# EAGLE board fanctrl (EAGLE 9.5.0)
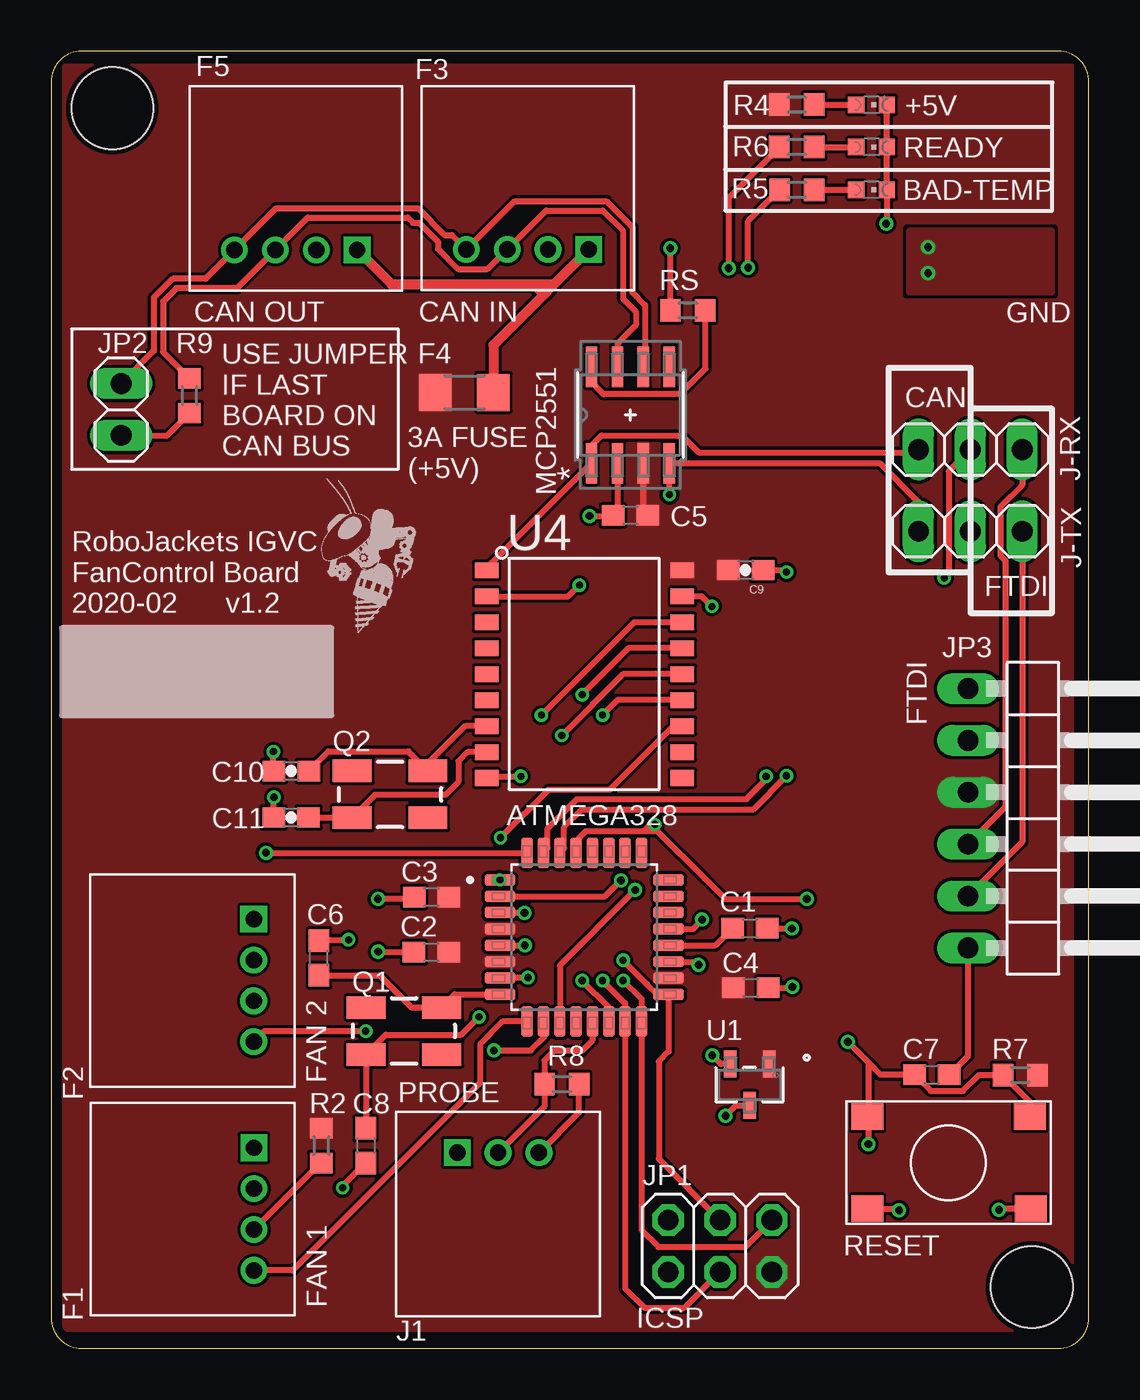
[diagram p0: board, top side]
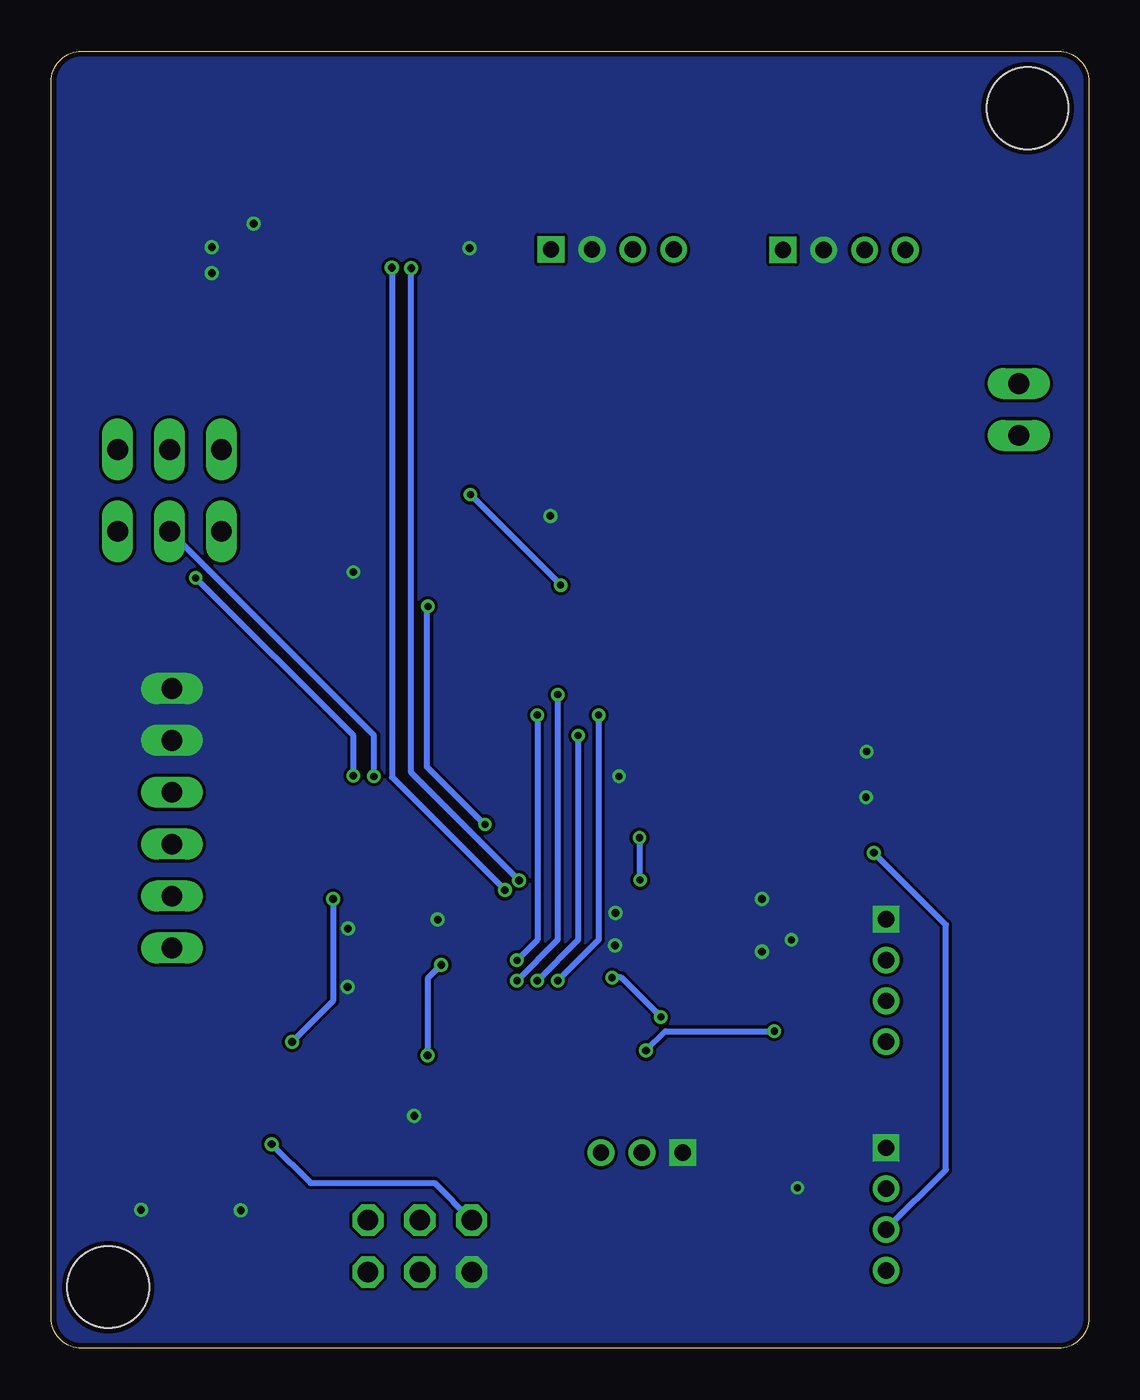
[diagram p1: board, bottom side, seen from below]

Size 50.8 x 63.5 mm. Coordinates in mm from the lower left corner, seen from the top.
Outline: 0,62 0,1.5 arc90 1.5,0 49.3,0 arc90 50.8,1.5 50.8,62 arc90 49.3,63.5 1.5,63.5 arc90 0,62
Copper layers (1*16): Top 0.035mm / dielectric 1.5mm / Bottom 0.035mm
Design rules "ITEADstudio_DRC": minimum track width 6mil, minimum drill 12mil, track to track 6mil, track to pad 6mil, pad to pad 6mil, via to via 6mil, smd to smd 0mil, copper to edge 10mil, drill to drill 10mil, minimum pad ring 10mil, minimum via ring 6mil, stop-mask expansion 2mil, vias tented up to drill 100mil, thermal gap 10mil
Holes 4 mm at 3,60.7 48,3

## Footprints (pad centres in the part's own frame; a part is rotated, then mirrored left to right if it is on the bottom)
CHIPLED_0603 = smd 0.8 x 0.8: A 0,-0.75; C 0,0.75
TQFP-32 = smd 1.5 x 0.57: 1 -4.13,2.8; 2 -4.13,2; 3 -4.13,1.2; 4 -4.13,0.4; 5 -4.13,-0.4; 6 -4.13,-1.2; 7 -4.13,-2; 8 -4.13,-2.8; 17 4.13,-2.8; 18 4.13,-2; 19 4.13,-1.2; 20 4.13,-0.4; 21 4.13,0.4; 22 4.13,1.2; 23 4.13,2; 24 4.13,2.8 | smd 0.57 x 1.5: 9 -2.8,-4.13; 10 -2,-4.13; 11 -1.2,-4.13; 12 -0.4,-4.13; 13 0.4,-4.13; 14 1.2,-4.13; 15 2,-4.13; 16 2.8,-4.13; 25 2.8,4.13; 26 2,4.13; 27 1.2,4.13; 28 0.4,4.13; 29 -0.4,4.13; 30 -1.2,4.13; 31 -2,4.13; 32 -2.8,4.13
PTS645 = smd 1.55 x 1.3: P$1 -3.975,2.25; P$2 3.975,2.25; P$3 -3.975,-2.25; P$4 4.025,-2.25
C0603 = smd 1.1 x 1: 1 -0.85,0; 2 0.85,0
0603-CAP = smd 1.1 x 1: 1 -0.85,0; 2 0.85,0
2MM-4-H = drill 0.8 square: 1 -3,0 | drill 0.8: 2 -1,0; 3 1,0; 4 3,0
F1206 = smd 1.6 x 1.803: 1 -1.422,0; 2 1.422,0
2MM-3-H = drill 0.8 square: 1 -2,0 | drill 0.8: 2 0,0; 3 2,0
1X03 = drill 1.016 long: 1 -2.54,0; 2 0,0; 3 2.54,0
2X03 = drill 1.016 octagon: 1 -2.54,-1.27; 2 -2.54,1.27; 3 0,-1.27; 4 0,1.27; 5 2.54,-1.27; 6 2.54,1.27
1X02 = drill 1.016 long: 1 -1.27,0; 2 1.27,0
1X06/90 = drill 1.016 long: 1 -6.35,-3.81; 2 -3.81,-3.81; 3 -1.27,-3.81; 4 1.27,-3.81; 5 3.81,-3.81; 6 6.35,-3.81
SOIC8-N_MC = smd 1.981 x 0.559: 1 -2.362,1.905; 2 -2.362,0.635; 3 -2.362,-0.635; 4 -2.362,-1.905; 5 2.362,-1.905; 6 2.362,-0.635; 7 2.362,0.635; 8 2.362,1.905
CRYSTAL-SMD-5X3 = smd 1.9 x 1.1: 1 -1.85,-1.15; 2 1.85,-1.15; 3 1.85,1.15; 4 -1.85,1.15
R0603 = smd 1 x 1.1: 1 -0.85,0; 2 0.85,0
SOT-23_MC = smd 0.619 x 1.31: 1 -0.95,-1.015; 2 0.95,-1.015; 3 0,1.015
SO-18W = smd 0.762 x 1.143: 1 -5.08,-4.788; 2 -3.81,-4.788; 3 -2.54,-4.788; 4 -1.27,-4.788; 5 0,-4.788; 6 1.27,-4.788; 7 2.54,-4.788; 8 3.81,-4.788; 9 5.08,-4.788; 10 5.08,4.788; 11 3.81,4.788; 12 2.54,4.788; 13 1.27,4.788; 14 0,4.788; 15 -1.27,4.788; 16 -2.54,4.788; 17 -3.81,4.788; 18 -5.08,4.788

## Placement (x,y rotation side)
+5V  GREEN  [CHIPLED_0603]  40.16,60.87 270 top
ATMEGA328  ATMEGA328P-AU  [TQFP-32]  26.1,20.13 0 top
B1  PTS645  [PTS645]  43.93,9.09 0 top
BAD-TEMP  RED  [CHIPLED_0603]  40.16,56.71 270 top
C1  0.1µF  [C0603]  34.2,20.56 0 top
C2  0.1µF  [C0603]  18.61,19.39 180 top
C3  0.1µF  [C0603]  18.62,22.09 180 top
C4  0.1µF  [C0603]  34.24,17.66 0 top
C5  0.1µF  [C0603]  28.36,40.77 180 top
C6  22pF  [C0603]  13.11,19.11 90 top
C7  0.1µF  [C0603]  43.11,13.4 0 top
C8  22pF  [C0603]  15.4,9.93 270 top
C9  0.1uF  [0603-CAP]  34,38.1 180 top
C10  22pF  [0603-CAP]  11.76,28.26 0 top
C11  22pF  [0603-CAP]  11.75,25.99 0 top
F1  4-PIN_2MM-H  [2MM-4-H]  9.93,6.82 270 top
F2  4-PIN_2MM-H  [2MM-4-H]  9.92,18.01 270 top
F3  4-PIN_2MM-H  [2MM-4-H]  23.32,53.79 180 top
F4  3A  [F1206]  20.23,46.79 180 top
F5  4-PIN_2MM-H  [2MM-4-H]  11.98,53.77 180 top
J1  3-PIN_2MM-H  [2MM-3-H]  21.88,9.58 0 top
J-RX  [1X03]  45,44 0 top
J-TX  [1X03]  45,40 0 top
JP1  ICSP  [2X03]  32.75,5.01 180 top
JP2  CAN_JUMPER  [1X02]  3.43,45.96 90 top
JP3  FTDI  [1X06/90]  48.7,25.95 270 top
MCP2551  MCP2551T-I/SN  [SOIC8-N_MC]  28.36,45.69 90 top
Q1  16MHz  [CRYSTAL-SMD-5X3]  17.27,15.54 0 top
Q2  16MHz  [CRYSTAL-SMD-5X3]  16.59,27.12 180 top
R2  1K  [R0603]  13.23,9.93 270 top
R4  470Ω  [R0603]  36.5,60.88 180 top
R5  470Ω  [R0603]  36.51,56.71 180 top
R6  470Ω  [R0603]  36.5,58.8 180 top
R7  10K  [R0603]  47.45,13.38 0 top
R8  4.7K  [R0603]  25,12.94 0 top
R9  120Ω  [R0603]  6.78,46.63 90 top
READY  BLUE  [CHIPLED_0603]  40.16,58.8 270 top
RS  60K  [R0603]  31.17,50.8 180 top
U1  MCP9701T-E/TT  [SOT-23_MC]  34.2,12.91 180 top
U4  MCP2515  [SO-18W]  26.11,33 270 top
U$1  [ROBOBUZZ_0.4X]  15,35 0 top

## Library data of the parts
+5V BAD-TEMP READY = led
ATMEGA328 = Microcontroller; CREATED_BY: PCBLayout.com; DIGIKEY_PART_NUMBER: ATMEGA328P-AU-ND; MANUFACTURER: Microchip Technology; MPN: ATMEGA328P-AU; PACKAGE: TQFP-32
B1 = RoboJackets-Switches; FUNCTION: RESET µCONTROLLER
C1-C8 = rcl; SPICEPREFIX: C
C9 = SparkFun-Capacitors; PROD_ID: CAP-00810
C10 C11 = SparkFun-Capacitors; PROD_ID: CAP-07876
F1-F3 F5 = RoboJackets-Connectors; DIGIKEY: WM18933-ND; MPN: 0353630460
F4 = RoboJackets-Fuses
J1 = RoboJackets-Connectors; PINS: 3; PIN_PITCH: 2.0 mm
J-RX J-TX JP1 JP3 = pinhead
JP2 = pinhead; SPICEPREFIX: B
MCP2551 = IGVC-Microcontroller; MANUFACTURER_PART_NUMBER: MCP2551TISN; VENDOR: Microchip
Q1 Q2 = SparkFun-FreqCtrl; PROD_ID: XTAL-08218
R2 R4-R6 R8 R9 RS = rcl; SPICEPREFIX: R
R7 = adafruit
U1 = MCP9701; MANUFACTURER_PART_NUMBER: MCP9701TETT; VENDOR: Microchip
U4 = SparkFun-DigitalIC; PROD_ID: IC-09906
U$1 = RoboJackets-Aesthetics

## Nets
!RESET: ATMEGA328.29 B1.P$1 B1.P$2 C7.1 JP1.5 R7.1 U4.17
+5V: ATMEGA328.4 ATMEGA328.6 ATMEGA328.18 C2.1 C3.1 C4.1 C5.1 C9.2 F4.2 JP1.2 JP3.3 MCP2551.3 R2.1 R4.2 R7.2 U1.1 U4.18
+5V_UNFUSED: F3.1 F4.1 F5.1
ANALOG-TEMP-READING: ATMEGA328.19 U1.2
AREF: ATMEGA328.20 C1.1
CAN_CS: ATMEGA328.14 U4.16
CAN_INT: ATMEGA328.1 U4.12
CAN_N: F3.4 F5.4 JP2.2 MCP2551.6
CAN_P: F3.3 F5.3 MCP2551.7 R9.2
CAN_RS: MCP2551.8 RS.1
CAN_RXD: J-TX.1 MCP2551.4 U4.2
CAN_TXD: J-RX.1 MCP2551.1 U4.1
DTR: C7.2 JP3.6
FAN1-PWM-OUT: ATMEGA328.9 F1.4
FAN1-TACH: ATMEGA328.32 F1.3 R2.2
FAN2-PWM-OUT: ATMEGA328.10 F2.4
FTDI_RX: J-TX.3 JP3.5
FTDI_TX: J-RX.3 JP3.4
GND: +5V.C ATMEGA328.3 ATMEGA328.5 ATMEGA328.21 B1.P$3 B1.P$4 BAD-TEMP.C C1.2 C2.2 C3.2 C4.2 C5.2 C6.2 C8.2 C9.1 C10.1 C11.1 F1.1 F2.1 F3.2 F5.2 J1.1 JP1.6 JP3.1 JP3.2 MCP2551.2 READY.C RS.2 U1.3 U4.9
INVALID-TEMP-LED: ATMEGA328.11 R5.2
MISO: ATMEGA328.16 JP1.1 U4.15
MOSI: ATMEGA328.15 JP1.4 U4.14
N$1: ATMEGA328.7 C8.1 Q1.1
N$2: J1.3 R8.2
N$3: +5V.A R4.1
N$4: BAD-TEMP.A R5.1
N$5: R6.1 READY.A
N$7: ATMEGA328.8 C6.1 Q1.3
N$17: C11.2 Q2.3 U4.8
N$18: C10.2 Q2.1 U4.7
PROBE-1WIRE: ATMEGA328.13 J1.2 R8.1
R_JUMPER: JP2.1 R9.1
RX: ATMEGA328.30 J-RX.2
SCK: ATMEGA328.17 JP1.3 U4.13
STATUS-READY-LED: ATMEGA328.2 R6.2
TX: ATMEGA328.31 J-TX.2

## Tracks (layer width: path | path; a pad name or v marks a point on that pad's centre or on a via)
!RESET  (via drill 0.35, 0.38)
  Top 0.3: v40,10 40,11.29 B1.P$1 40,11.38 40,14 | 29,25.31 29.69,25.31 32,23 33,22 v37,22 | 29,25.31 26.17,25.31 25.7,24.84 ATMEGA328.29 | 40,14 40.6,13.4 C7.1 43.06,12.6 44.63,12.6 45.43,13.38 R7.1 47.91,12.07 B1.P$2 | v39,15 40,14 | v32.35,36.32 31.86,36.81 U4.17 | 29,25.31 29.33,25.64 v29.55,25.64
  Bottom 0.3: v40,10 38.1,8.1 32.03,8.1 JP1.5 | v39,15 37,17 v37,22 | v29.55,25.64 29.59,25.64 32.4,28.46 32.4,36.27 v32.35,36.32
+5V
  Top 0.3: MCP2551.3 28.98,43.32 28.98,40.99 C5.1
  pour Top (rank 5, no thermals): 0.62,62.83 50,62.83 50,0.88 0.75,0.88 arc-45 0.62,1.18
+5V_UNFUSED
  Top 0.5: F3.1 24.6,52.06 | F4.1 21.65,49.12 24.12,51.58 | 24.6,52.06 23.64,52.06 | 23.64,52.06 16.69,52.06 F5.1 | 24.6,52.06 24.12,51.58 | 23.64,52.06 24.12,51.58
ANALOG-TEMP-READING  (via drill 0.38)
  Top 0.3: ATMEGA328.19 31.54,18.93 v31.7,18.77 | U1.2 32.78,13.93 v32.37,14.35
  Bottom 0.3: v31.7,18.77 32.37,18.11 v32.37,14.35
AREF
  Top 0.3: ATMEGA328.20 32.52,19.73 C1.1
CAN_CS  (via drill 0.35)
  Top 0.3: U4.16 28.54,35.54 v24,31 | v26,18 27.3,16.7 ATMEGA328.14
  Bottom 0.3: v24,31 24,20 v26,18
CAN_INT  (via drill 0.35)
  Top 0.3: U4.12 30.46,30.46 27.34,27.34 24.34,27.34 v22,25
  Bottom 0.3: v22,25 22,22.96 ATMEGA328.1
  other vias: 21.97,22.93
CAN_N
  Top 0.3: JP2.2 5.03,48.83 5.03,51.44 5.95,52.36 7.57,52.36 F5.4 11.01,55.8 17.95,55.8 19.26,54.5 19.62,54.5 F3.4 22.69,56.15 27.19,56.15 28.45,54.89 28.45,51.7 29.08,51.07 29.08,48.14 MCP2551.6
CAN_P
  Top 0.3: R9.2 5.48,48.77 5.48,51.25 6.14,51.91 9.12,51.91 F5.3 12.56,55.35 17.46,55.35 17.71,55.1 18.02,55.1 18.94,54.18 18.94,53.83 19.93,52.83 21.37,52.83 F3.3 24.23,55.7 27,55.7 28,54.7 28,51.37 28.63,50.74 28.63,50.09 27.73,49.19 MCP2551.7
CAN_RS
  Top 0.3: RS.1 32.04,50.78 32.04,47.95 30.79,46.7 27.05,46.7 26.45,47.3 MCP2551.8
CAN_RXD  (via drill 0.35)
  Top 0.3: J-TX.1 42.46,41.43 40.56,43.33 MCP2551.4 v30.27,41.8 v30.27,41.79 | U4.2 25.31,36.81 v25.86,37.36
  Bottom 0.3: v30.27,41.79 25.86,37.38 v25.86,37.36
CAN_TXD
  Top 0.3: J-RX.1 42.31,43.85 31.71,43.85 30.87,44.69 26.95,44.69 26.45,44.2 MCP2551.1 21.32,38.2 U4.1
DTR
  Top 0.3: C7.2 44.89,14.33 JP3.6
FAN1-PWM-OUT
  Top 0.3: ATMEGA328.9 22.11,16 21,14.89 21,13 11.82,3.82 F1.4
FAN1-TACH  (via drill 0.38)
  Top 0.3: F1.3 13.19,9.08 R2.2 | v10.52,24.26 ATMEGA328.32
  Bottom 0.3: F1.3 7,8.75 7,20.74 v10.52,24.26
FAN2-PWM-OUT  (via drill 0.35, 0.38)
  Top 0.3: ATMEGA328.10 24.15,15.95 24.15,15.26 23.47,14.58 v21.67,14.58 | v15.4,15.53 10.44,15.53 F2.4
  Bottom 0.3: v15.4,15.53 20.72,15.53 v21.67,14.58
FTDI_RX
  Top 0.3: J-TX.3 47.54,24.79 JP3.5
FTDI_TX
  Top 0.3: J-RX.3 47.54,42.27 46.48,41.2 46.48,38.8 46.72,38.56 46.72,26.51 JP3.4
GND  (via drill 0.35, 0.38)
  Top 0.3: ATMEGA328.21 31.41,20.53 v31.87,20.99 | C1.2 v36.26,20.56 v36.27,20.55 | C4.2 36.24,17.66 v36.29,17.7 | B1.P$3 41.43,6.84 v41.51,6.76 | B1.P$4 46.46,6.84 v46.4,6.78 | +5V.C READY.C BAD-TEMP.C 40.91,55.08 v40.88,55.05 | ATMEGA328.5 v23.19,19.73 | ATMEGA328.3 23.15,21.33 v23.17,21.31 | C3.2 17.68,22 v16,22 | C2.2 16.04,19.39 v16.01,19.42 | v26.36,40.75 27.49,40.75 C5.2 27.73,40.98 MCP2551.2 | RS.2 v30.32,53.84 v30.31,53.85 | v33.02,11.38 33.53,11.89 U1.3 | C6.2 13.15,20 v14.56,20 | C8.2 14.27,7.95 v14.27,7.86 | C9.1 35.9,38.1 v36,38 | U4.9 21.4,28 v23,28 | C10.1 10.88,28.29 v10.88,29.21 | C11.1 10.9,26.9 10.89,26.91 10.89,26.96 v10.91,26.98
  other vias: 42.93,52.63 42.93,53.9
  pour Bottom (no thermals): -0.25,64.33 50.7,64.33 arc-45 51,64.2 51,0.41 arc45 51.38,-0.5 0.35,-0.5 arc-45 -0.25,-0.25 -0.25,63.85 arc45 -0.5,64.45 arc-45 -0.29,64.36
  pour Top (no thermals): 42,54.7 42,51.7 49,51.7 49,54.7
INVALID-TEMP-LED  (via drill 0.38)
  Top 0.3: ATMEGA328.11 24.9,18.74 v28.59,22.43 | v34.12,52.9 34.12,55.17 R5.2
  Bottom 0.3: v28.59,22.43 34.12,27.96 v34.12,52.9
MISO  (via drill 0.35)
  Top 0.3: JP1.1 33.98,4.97 29.72,4.97 28.9,5.79 ATMEGA328.16 28.9,17.1 v28,18 | U4.15 28.27,34.27 v26,32
  Bottom 0.3: v26,32 26,20 v28,18
MOSI  (via drill 0.35)
  Top 0.3: JP1.4 31,1.99 29.04,1.99 28.1,2.93 ATMEGA328.15 28.1,16.9 v27,18 | U4.14 28,33 v25,30
  Bottom 0.3: v25,30 25,20 v27,18
N$1  (via drill 0.35)
  Top 0.3: C8.1 15.42,10.8 Q1.1 16.38,15.35 20.08,15.35 v20.95,16.22 | v23.34,18.15 23.32,18.13 ATMEGA328.7
  Bottom 0.3: v20.95,16.22 22.88,18.15 v23.34,18.15
N$2
  Top 0.3: J1.3 25.85,11.55 R8.2
N$3
  Top 0.3: R4.1 +5V.A
N$4
  Top 0.3: R5.1 BAD-TEMP.A
N$5
  Top 0.3: R6.1 READY.A
N$7
  Top 0.3: C6.1 16.08,18.26 17.65,16.69 Q1.3 19.76,17.33 ATMEGA328.8
N$17
  Top 0.3: U4.8 20.39,29.19 19.94,28.74 19.94,27.73 19.3,27.09 15.86,27.09 Q2.3 14.72,25.99 C11.2
N$18
  Top 0.3: U4.7 20.26,30.46 18.44,28.64 Q2.1 17.48,29.23 13.58,29.23 C10.2
PROBE-1WIRE
  Top 0.3: J1.2 24.15,11.85 R8.1 24.15,14.09 24.63,14.57 25.99,14.57 26.5,15.08 ATMEGA328.13
R_JUMPER
  Top 0.3: JP2.1 5.68,44.69 R9.1
RX  (via drill 0.35)
  Top 0.3: ATMEGA328.30 25.11,24.47 25.11,25.52 25.98,26.39 34.37,26.39 v36,28.02 v36,28.03 | v43.72,37.71 43.94,37.93 43.94,42.94 J-RX.2
  Bottom 0.3: v36,28.03 36,29.99 v43.72,37.71
SCK  (via drill 0.35)
  Top 0.3: JP1.3 29.75,9.28 29.75,14.05 30.23,14.53 ATMEGA328.17 29.65,17.33 29.18,17.8 29.18,17.82 v28,19 | U4.13 27.73,31.73 v27,31
  Bottom 0.3: v27,31 27,20 v28,19
STATUS-READY-LED  (via drill 0.38)
  Top 0.3: ATMEGA328.2 27.12,22.13 v27.89,22.9 | v33.17,52.87 33.17,56.32 R6.2
  Bottom 0.3: v27.89,22.9 33.17,28.18 v33.17,52.87
TX  (via drill 0.35)
  Top 0.3: ATMEGA328.31 24.31,24.47 24.31,25.45 25.75,26.89 34.04,26.89 35,27.85 v35,28
  Bottom 0.3: v35,28 35,30 J-TX.2

## Text on the board
tPlace: CAN OUT | CAN IN | GND | CAN | USE JUMPER / IF LAST / BOARD ON / CAN BUS | 3A FUSE / (+5V) | FTDI | RoboJackets IGVC / FanControl Board / 2020-02 v1.2 | FTDI | FAN 2 | PROBE | RESET | FAN 1 | ICSP
tDocu: B1